# EAGLE board PCB_Layout (EAGLE 9.6.2)
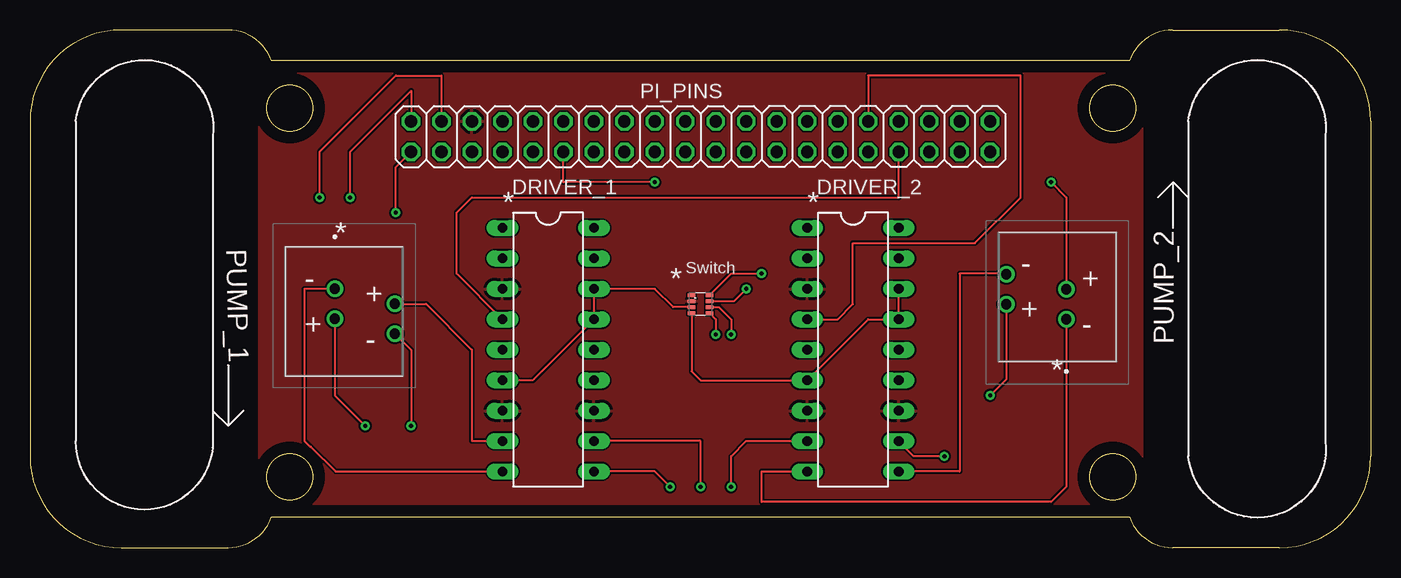
[diagram p0: board, top side]
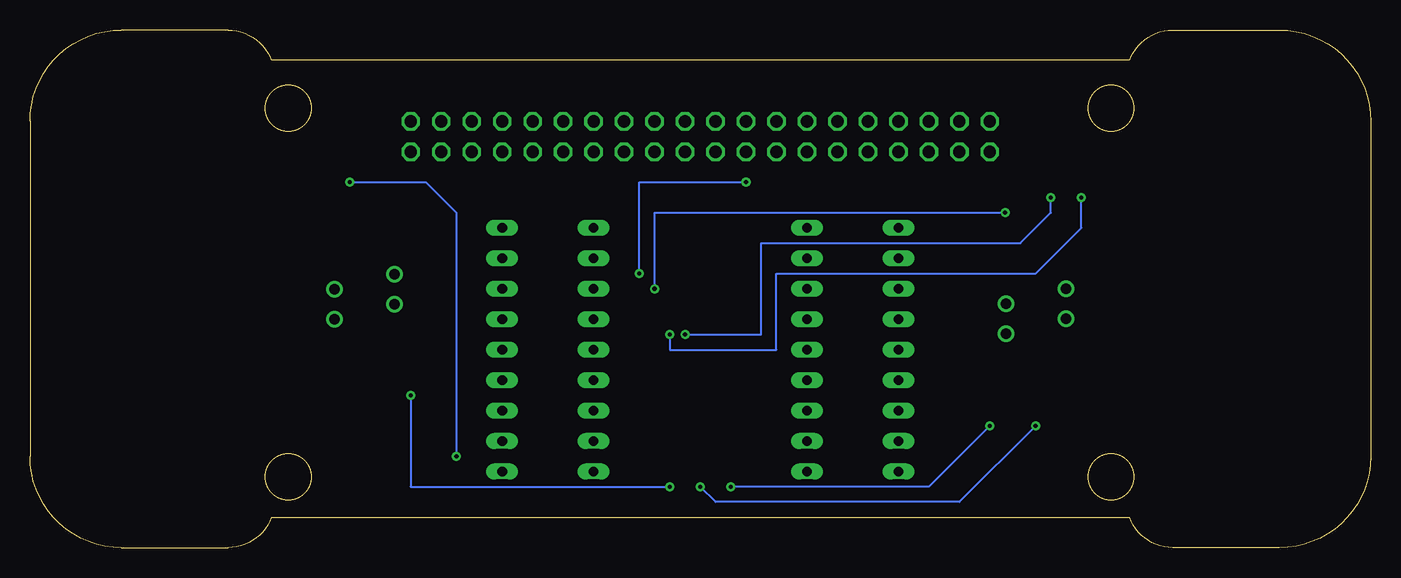
[diagram p1: board, bottom side, seen from below]

Size 111.74 x 43.18 mm. Coordinates in mm from the lower left corner, seen from the top.
Outline: 16.51,43.18 7.62,43.18 arc90 0,35.56 0,7.62 arc90 7.62,0 16.51,0 arc71 20.1,2.54 91.64,2.54 arc71 95.23,0 104.12,0 arc90 111.74,7.62 111.74,35.56 arc90 104.12,43.18 95.23,43.18 arc71 91.64,40.64 20.1,40.64 arc71 16.51,43.18
Outline: circle at 90.23,5.92 radius 1.91
Outline: circle at 21.66,36.66 radius 1.91
Outline: circle at 21.66,5.92 radius 1.91
Outline: circle at 90.23,36.66 radius 1.91
Copper layers (1*16): Top 0.035mm / dielectric 1.5mm / Bottom 0.035mm
Design rules "default": minimum track width 6mil, minimum drill 0.35mm, track to track 6mil, track to pad 6mil, pad to pad 6mil, via to via 6mil, smd to smd 6mil, copper to edge 40mil, drill to drill 6mil, minimum pad ring 10mil, minimum via ring 8mil, stop-mask expansion 4mil, vias tented up to drill 0mil, thermal gap 10mil

## Footprints (pad centres in the part's own frame; a part is rotated, then mirrored left to right if it is on the bottom)
DIL18 = drill 0.813 long: 1 -10.16,-3.81; 2 -7.62,-3.81; 3 -5.08,-3.81; 4 -2.54,-3.81; 5 0,-3.81; 6 2.54,-3.81; 7 5.08,-3.81; 8 7.62,-3.81; 9 10.16,-3.81; 10 10.16,3.81; 11 7.62,3.81; 12 5.08,3.81; 13 2.54,3.81; 14 0,3.81; 15 -2.54,3.81; 16 -5.08,3.81; 17 -7.62,3.81; 18 -10.16,3.81
2X20 = drill 1.016 octagon: 1 -24.13,-1.27; 2 -24.13,1.27; 3 -21.59,-1.27; 4 -21.59,1.27; 5 -19.05,-1.27; 6 -19.05,1.27; 7 -16.51,-1.27; 8 -16.51,1.27; 9 -13.97,-1.27; 10 -13.97,1.27; 11 -11.43,-1.27; 12 -11.43,1.27; 13 -8.89,-1.27; 14 -8.89,1.27; 15 -6.35,-1.27; 16 -6.35,1.27; 17 -3.81,-1.27; 18 -3.81,1.27; 19 -1.27,-1.27; 20 -1.27,1.27; 21 1.27,-1.27; 22 1.27,1.27; 23 3.81,-1.27; 24 3.81,1.27; 25 6.35,-1.27; 26 6.35,1.27; 27 8.89,-1.27; 28 8.89,1.27; 29 11.43,-1.27; 30 11.43,1.27; 31 13.97,-1.27; 32 13.97,1.27; 33 16.51,-1.27; 34 16.51,1.27; 35 19.05,-1.27; 36 19.05,1.27; 37 21.59,-1.27; 38 21.59,1.27; 39 24.13,-1.27; 40 24.13,1.27
0039532044 = drill 0.85 pad 1.381: 1 0,0; 2 1.25,5; 3 2.5,0; 4 3.75,5
UDFN8 = smd 0.3 x 0.6: 1 -0.75,-0.75; 2 -0.25,-0.75; 3 0.25,-0.75; 4 0.75,-0.75; 5 0.75,0.75; 6 0.25,0.75; 7 -0.25,0.75; 8 -0.75,0.75

## Placement (x,y rotation side)
DRIVER_1  [DIL18]  43.18,16.51 270 top
DRIVER_2  [DIL18]  68.58,16.51 270 top
PI_PINS  [2X20]  55.88,34.29 0 top
PUMP_1  0039532044  [0039532044]  25.4,21.59 270 top
PUMP_2  0039532044  [0039532044]  86.36,19.05 90 top
SWITCH  MAX4907ELB  [UDFN8]  55.88,20.32 270 top

## Library data of the parts
DRIVER_1 DRIVER_2 = ic-package
PI_PINS = pinhead
PUMP_1 PUMP_2 = 0039532044; ARROW_PART_NUMBER: 0039532044; ARROW_PRICE-STOCK: https://www.arrow.com/en/products/0039532044/molex?region=europe; DESCRIPTION: Conn FPC Connector SKT 4 POS 1.25mm Solder RA Thru-Hole Tray; HEIGHT: 5.6mm; MANUFACTURER_NAME: Molex; MANUFACTURER_PART_NUMBER: 0039532044; MOUSER_PART_NUMBER: N/A; MOUSER_PRICE-STOCK: https://www.mouser.co.uk/ProductDetail/Molex/0039532044?qs=PBcRNPEHKsopUbhCVSpiQg%3D%3D
SWITCH = maxim; OC_FARNELL: unknown; OC_NEWARK: unknown

## Nets
3: PI_PINS.3
3V3_OUT(1): PI_PINS.1 SWITCH.7
3V3_OUT(17): PI_PINS.17
5: PI_PINS.5
5V_OUT(2): PI_PINS.2 SWITCH.5
5V_OUT(4): PI_PINS.4 SWITCH.6
7: PI_PINS.7
8: PI_PINS.8
9: PI_PINS.9
10: PI_PINS.10
12: PI_PINS.12
13: PI_PINS.13
14: PI_PINS.14
15: PI_PINS.15
16: PI_PINS.16
18: PI_PINS.18
19: PI_PINS.19
20: PI_PINS.20
21: PI_PINS.21
22: PI_PINS.22
23: PI_PINS.23
24: PI_PINS.24
25: PI_PINS.25
26: PI_PINS.26
27: PI_PINS.27
28: PI_PINS.28
29: PI_PINS.29
30: PI_PINS.30
31: PI_PINS.31
34: PI_PINS.34
35: PI_PINS.35
36: PI_PINS.36
37: PI_PINS.37
38: PI_PINS.38
39: PI_PINS.39
40: PI_PINS.40
CLK-1: DRIVER_1.4 PI_PINS.33
CLK-2: DRIVER_2.4 PI_PINS.32
CLK-INT-2: DRIVER_2.5
CLK_INT-1: DRIVER_1.5
GND: DRIVER_1.3 DRIVER_1.7 DRIVER_1.12 DRIVER_2.3 DRIVER_2.7 DRIVER_2.12 PI_PINS.6 SWITCH.2
GPIO_17(LOGIC): PI_PINS.11 SWITCH.8
NC-1: DRIVER_2.1
NC-2: DRIVER_2.2
NC-17: DRIVER_2.17
NC-18: DRIVER_2.18
NC_1: DRIVER_1.1
NC_2: DRIVER_1.2
NC_17: DRIVER_1.17
NC_18: DRIVER_1.18
P1+-1: DRIVER_1.8 PUMP_1.2
P1+-2: DRIVER_2.8 PUMP_2.2
P1-2: DRIVER_2.9 PUMP_2.1
P1--1: DRIVER_1.9 PUMP_1.1
P2+2: DRIVER_2.11 PUMP_2.3
P2+-1: DRIVER_1.11 PUMP_1.3
P2-2: DRIVER_2.10 PUMP_2.4
P2--1: DRIVER_1.10 PUMP_1.4
SCL-1: DRIVER_1.13
SCL-2: DRIVER_2.13
SDA-1: DRIVER_1.14
SDA-2: DRIVER_2.14
SHDN/!EN: SWITCH.1
VDD-1: DRIVER_1.6 DRIVER_1.15 DRIVER_1.16 SWITCH.3
VDD-2: DRIVER_2.6 DRIVER_2.15 DRIVER_2.16 SWITCH.4

## Tracks (layer width: path | path; a pad name or v marks a point on that pad's centre or on a via)
3V3_OUT(1)  (via drill 0.35)
  Top 0.152: SWITCH.7 58.67,20.57 v59.69,21.59 | v30.48,27.94 30.48,31.75 PI_PINS.1
  Bottom 0.152: v59.69,21.59 59.69,27.94 v30.48,27.94
5V_OUT(2)  (via drill 0.35)
  Top 0.152: SWITCH.5 57.15,19.05 v57.15,17.78 | v26.67,29.21 26.67,33.02 31.75,38.1 PI_PINS.2
  Bottom 0.152: v57.15,17.78 50.8,17.78 50.8,25.4 29.21,25.4 26.67,27.94 v26.67,29.21
5V_OUT(4)  (via drill 0.35)
  Top 0.152: SWITCH.6 57.4,20.07 58.42,19.05 v58.42,17.78 | v24.13,29.21 24.13,33.02 30.48,39.37 34.29,39.37 PI_PINS.4
  Bottom 0.152: v58.42,17.78 58.42,16.51 49.53,16.51 49.53,22.86 27.94,22.86 24.13,26.67 v24.13,29.21
CLK-1
  Top 0.152: DRIVER_1.4 35.56,22.86 35.56,27.94 36.83,29.21 72.39,29.21 PI_PINS.33
CLK-2
  Top 0.152: DRIVER_2.4 67.31,19.05 68.58,20.32 68.58,25.4 78.74,25.4 82.55,29.21 82.55,39.37 69.85,39.37 PI_PINS.32
GND
  pour Top: 19.05,39.37 19.05,2.54 92.71,2.54 92.71,40.64 19.05,40.64
GPIO_17(LOGIC)  (via drill 0.35)
  Top 0.152: SWITCH.8 58.42,22.86 v60.96,22.86 | v52.07,30.48 44.45,30.48 PI_PINS.11
  Bottom 0.152: v60.96,22.86 60.96,30.48 v52.07,30.48
P1+-1
  Top 0.152: PUMP_1.2 33,20.34 36.83,16.51 36.83,8.89 DRIVER_1.8
P1+-2  (via drill 0.35)
  Top 0.152: PUMP_2.2 81.36,14.05 v80.01,12.7 | v58.42,5.08 58.42,7.62 59.69,8.89 DRIVER_2.8
  Bottom 0.152: v80.01,12.7 80.01,5.08 v58.42,5.08
P1-2
  Top 0.152: PUMP_2.1 86.36,5.08 85.09,3.81 60.96,3.81 60.96,6.35 DRIVER_2.9
P1--1
  Top 0.152: PUMP_1.1 22.86,21.59 22.86,8.89 23.34,8.41 23.4,8.41 25.47,6.35 DRIVER_1.9
P2+2  (via drill 0.35)
  Top 0.152: PUMP_2.3 86.36,29.21 v85.09,30.48 | v76.2,7.62 73.66,7.62 DRIVER_2.11
  Bottom 0.152: v85.09,30.48 78.74,30.48 76.2,27.94 v76.2,7.62
P2+-1  (via drill 0.35)
  Top 0.152: PUMP_1.3 25.4,12.7 v27.94,10.16 | v55.88,5.08 55.88,8.89 DRIVER_1.11
  Bottom 0.152: v27.94,10.16 34.29,3.81 54.61,3.81 v55.88,5.08
P2-2
  Top 0.152: PUMP_2.4 81.3,22.86 77.47,22.86 77.47,6.35 DRIVER_2.10
P2--1  (via drill 0.35)
  Top 0.152: PUMP_1.4 31.75,16.49 v31.75,10.16 | v53.34,5.08 52.07,6.35 DRIVER_1.10
  Bottom 0.152: v31.75,10.16 36.83,5.08 v53.34,5.08
VDD-1
  Top 0.152: SWITCH.3 53.59,20.07 52.07,21.59 DRIVER_1.16 DRIVER_1.15 41.91,13.97 DRIVER_1.6
VDD-2
  Top 0.152: SWITCH.4 55.13,14.72 55.88,13.97 DRIVER_2.6 69.85,19.05 DRIVER_2.15 DRIVER_2.16

## Text on the board
tNames: * | * | * | Switch | - | - | * | + | + | + | + | - | - | *